# EAGLE board Input_2 (EAGLE 7.2.0)
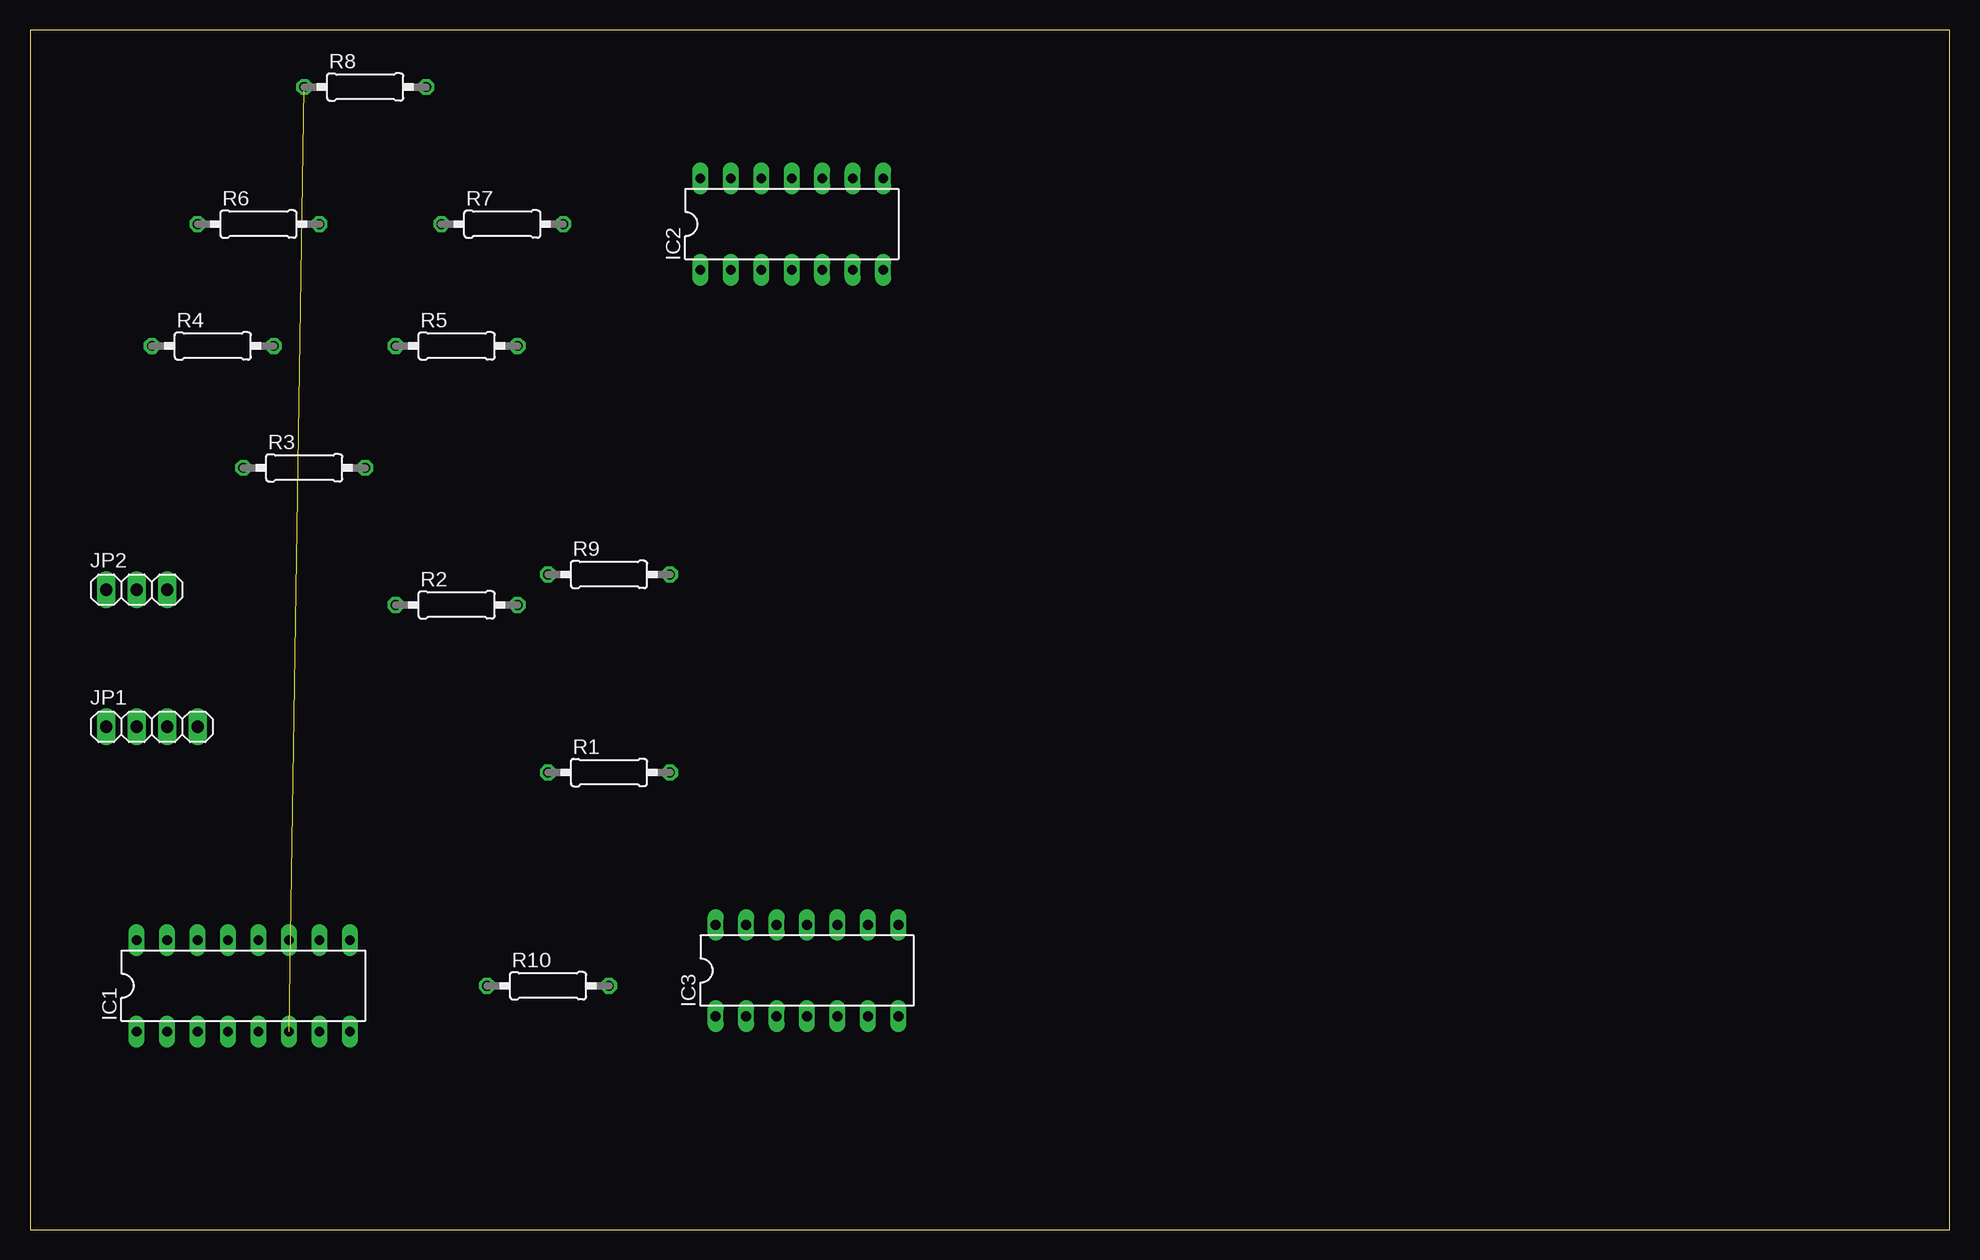
[diagram p0: board, top side]
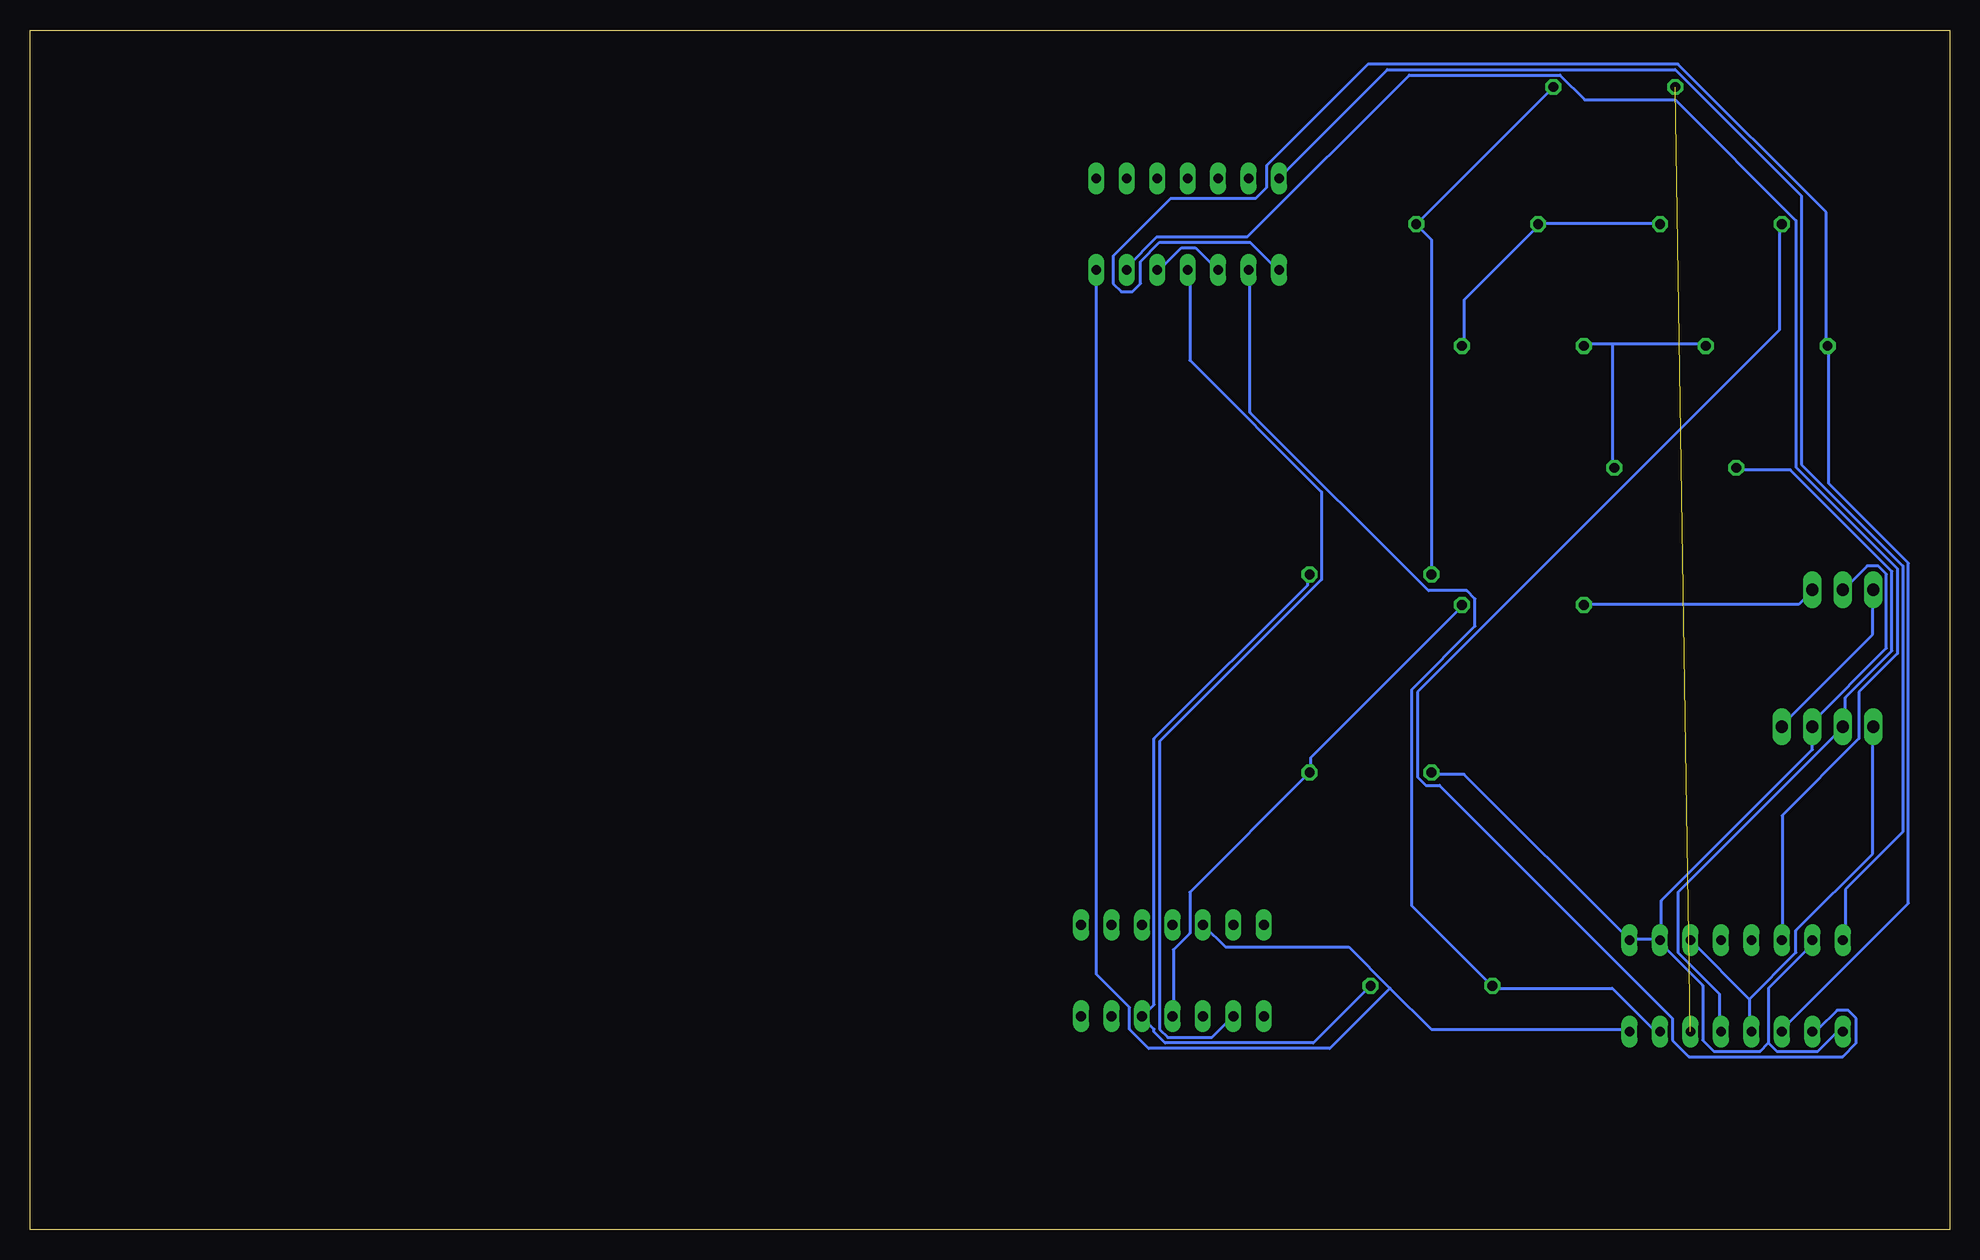
[diagram p1: board, bottom side, seen from below]

Size 160 x 100 mm. Coordinates in mm from the lower left corner, seen from the top.
Outline: 0,0 160,0 160,100 0,100 0,0
Copper layers (1*16): Top 0.035mm / dielectric 1.5mm / Bottom 0.035mm
Design rules "default": minimum track width 10mil, minimum drill 24mil, track to track 8mil, track to pad 8mil, pad to pad 8mil, via to via 8mil, smd to smd 8mil, copper to edge 40mil, drill to drill 8mil, minimum pad ring 10mil, minimum via ring 8mil, stop-mask expansion 4mil, vias tented up to drill 0mil, thermal gap 10mil

## Footprints (pad centres in the part's own frame; a part is rotated, then mirrored left to right if it is on the bottom)
DIL16 = drill 0.813 long: 1 -8.89,-3.81; 2 -6.35,-3.81; 3 -3.81,-3.81; 4 -1.27,-3.81; 5 1.27,-3.81; 6 3.81,-3.81; 7 6.35,-3.81; 8 8.89,-3.81; 9 8.89,3.81; 10 6.35,3.81; 11 3.81,3.81; 12 1.27,3.81; 13 -1.27,3.81; 14 -3.81,3.81; 15 -6.35,3.81; 16 -8.89,3.81
DIL14 = drill 0.813 long: 1 -7.62,-3.81; 2 -5.08,-3.81; 3 -2.54,-3.81; 4 0,-3.81; 5 2.54,-3.81; 6 5.08,-3.81; 7 7.62,-3.81; 8 7.62,3.81; 9 5.08,3.81; 10 2.54,3.81; 11 0,3.81; 12 -2.54,3.81; 13 -5.08,3.81; 14 -7.62,3.81
1X04 = drill 1.016 long: 1 -3.81,0; 2 -1.27,0; 3 1.27,0; 4 3.81,0
1X03 = drill 1.016 long: 1 -2.54,0; 2 0,0; 3 2.54,0
0207/10 = drill 0.813 octagon: 1 -5.08,0; 2 5.08,0

## Placement (x,y rotation side)
IC1  74LS192N  [DIL16]  17.78,20.32 0 top
IC2  74LS08N  [DIL14]  63.5,83.82 0 top
IC3  LM339N  [DIL14]  64.77,21.59 0 top
JP1  [1X04]  10.16,41.91 0 top
JP2  [1X03]  8.89,53.34 0 top
R1  [0207/10]  48.26,38.1 0 top
R2  [0207/10]  35.56,52.07 0 top
R3  [0207/10]  22.86,63.5 0 top
R4  [0207/10]  15.24,73.66 0 top
R5  [0207/10]  35.56,73.66 0 top
R6  [0207/10]  19.05,83.82 0 top
R7  [0207/10]  39.37,83.82 0 top
R8  [0207/10]  27.94,95.25 0 top
R9  [0207/10]  48.26,54.61 0 top
R10  [0207/10]  43.18,20.32 0 top

## Library data of the parts
IC1 = 74xx-us
IC2 = 74xx-eu
IC3 = linear
JP1 JP2 = pinhead
R1-R10 = rcl

## Nets
GND: IC1.8 IC2.7 IC3.12
N$1: IC3.5 R9.2 R10.2
N$2: IC1.3 IC2.1 R4.1
N$3: IC2.3 IC2.5
N$4: IC1.14 IC2.6
N$5: IC1.5 JP1.2 R3.1
N$6: IC1.4 IC1.11 JP1.1
N$7: IC1.1 IC1.9 IC1.10 IC1.15 JP1.3 JP2.2 R1.1
N$8: IC2.4 IC3.2
N$9: IC3.4 R1.2 R2.2
N$11: JP2.3 R2.1
N$12: JP1.4 JP2.1
N$14: R7.2 R8.2 R9.1
N$15: R5.2 R6.2 R7.1
N$16: R3.2 R4.2 R5.1
N$17: IC1.6 R8.1
N$18: IC1.2 R6.1
N$20: IC1.7 IC2.2 R10.1
V+: IC3.3
VCC: IC1.16 IC2.14

## Tracks (layer width: path | path; a pad name or v marks a point on that pad's centre or on a via)
GND
  Bottom 0.254: 46.63,20.12 50.06,23.55 60.35,23.55 62.18,25.38 IC3.12 | 46.63,20.12 43.2,16.69 26.75,16.69 IC1.8 | 46.63,20.12 51.66,15.09 66.75,15.09 68.35,16.69 68.35,18.52 71.09,21.26 71.09,80.01 IC2.7
N$1
  Bottom 0.254: R10.2 53.03,15.54 65.38,15.54 66.29,16.46 66.29,16.69 67.21,17.6 IC3.5 67.21,17.83 66.29,18.75 66.29,40.92 53.49,53.72 53.49,54.41 R9.2
N$2
  Bottom 0.254: IC1.3 13.95,16.69 3.43,27.2 3.43,55.55 10.06,62.18 10.06,73.61 R4.1 10.29,73.84 10.29,84.81 22.63,97.16 48.46,97.16 56.92,88.7 56.92,86.87 57.84,85.95 64.92,85.95 69.72,81.15 69.72,78.87 69.04,78.18 68.12,78.18 67.44,78.87 67.44,80.7 65.84,82.3 58.29,82.3 56.01,80.01 IC2.1
N$3
  Bottom 0.254: IC2.3 61.04,80.01 62.87,81.84 64.01,81.84 65.84,80.01 IC2.5
N$4
  Bottom 0.254: IC2.6 68.58,80.24 66.06,82.75 58.52,82.75 45.03,96.24 32.46,96.24 30.4,94.18 22.86,94.18 12.8,84.12 12.8,63.55 4.34,55.09 4.34,48.01 7.54,44.81 7.54,40.92 13.95,34.52 13.95,24.23 IC1.14
N$5
  Bottom 0.254: R3.1 17.6,63.32 13.26,63.32 4.8,54.86 4.8,48.23 8.69,44.35 8.69,42.06 JP1.2 8.91,41.83 22.63,28.12 22.63,23.09 19.2,19.66 19.2,16.69 IC1.5
N$6
  Bottom 0.254: 16.69,19.2 16.69,16.69 IC1.4 | 16.69,19.2 21.49,24 IC1.11 | 16.69,19.2 12.8,23.09 12.8,24.92 6.4,31.32 6.4,41.83 JP1.1
N$7
  Bottom 0.254: JP2.2 8.69,53.49 6.86,55.32 5.94,55.32 5.26,54.63 5.26,48.46 11.43,42.29 JP1.3 11.43,40.01 24,27.43 24,24.23 IC1.10 | 15.09,15.54 14.4,14.86 10.97,14.86 9.37,16.46 8.91,16.46 IC1.1 | 15.09,15.54 15.09,20.12 11.43,23.77 IC1.15 | IC1.10 24.23,24.23 26.52,24.23 IC1.9 26.75,24.23 40.46,37.95 42.98,37.95 R1.1 | 15.09,15.54 15.77,14.86 19.66,14.86 20.57,15.77 20.57,20.34 24.23,24 IC1.10
N$8
  Bottom 0.254: IC3.2 59.89,17.6 61.49,16 65.15,16 65.84,16.69 65.84,40.69 52.35,54.18 52.35,61.49 63.32,72.47 63.32,80.01 IC2.4
N$9
  Bottom 0.254: R2.2 40.69,51.89 53.26,39.32 53.26,38.18 R1.2 63.32,28.12 63.32,24.69 64.69,23.32 64.69,17.83 IC3.4
N$11
  Bottom 0.254: R2.1 30.4,52.12 12.57,52.12 11.43,53.26 JP2.3
N$12
  Bottom 0.254: JP2.1 6.4,53.26 6.4,49.61 13.95,42.06 JP1.4
N$14
  Bottom 0.254: R9.1 43.2,54.63 43.2,82.53 44.35,83.67 R7.2 44.35,83.9 33.15,95.1 R8.2
N$15
  Bottom 0.254: R5.2 40.46,73.84 40.46,77.5 34.29,83.67 R7.1 34.29,83.9 24.23,83.9 R6.2
N$16
  Bottom 0.254: 28.12,73.84 30.4,73.84 R5.1 | 28.12,73.84 20.34,73.84 R4.2 | 28.12,73.84 28.12,63.55 R3.2
N$17  (1 unrouted)
N$18
  Bottom 0.254: IC1.2 11.43,16.69 10.97,16.69 9.37,18.29 8.46,18.29 7.77,17.6 7.77,15.54 8.91,14.4 21.72,14.4 23.09,15.77 23.09,17.6 42.52,37.03 43.66,37.03 44.35,37.72 44.35,44.81 14.17,74.98 14.17,83.67 R6.1
N$20
  Bottom 0.254: IC1.7 24.23,16.69 24.69,16.69 28.12,20.12 37.95,20.12 R10.1 38.18,20.34 44.81,26.98 44.81,45.03 39.55,50.29 39.55,52.58 40.23,53.26 43.43,53.26 58.29,68.12 58.29,80.01 IC2.2
VCC
  Bottom 0.254: IC1.16 8.69,24.23 8.69,28.35 3.89,33.15 3.89,55.32 12.34,63.78 12.34,86.18 22.86,96.7 46.86,96.7 55.78,87.78 IC2.14